# Altium PCB Audio_testboard.PcbDoc (part 3 of 6)
Units mm, origin at the board's own origin, x right, y up, seen from the top; angles counter-clockwise.
Board outline 220.73 x 144.32 mm, 4 copper layers (Top Layer, Mid-Layer 1, Mid-Layer 2, Bottom Layer), stack 1.894 mm thick; 462 components, 310 nets, 1757 pads, 740 vias.
Unrouted connection lines stored in the file: 5.
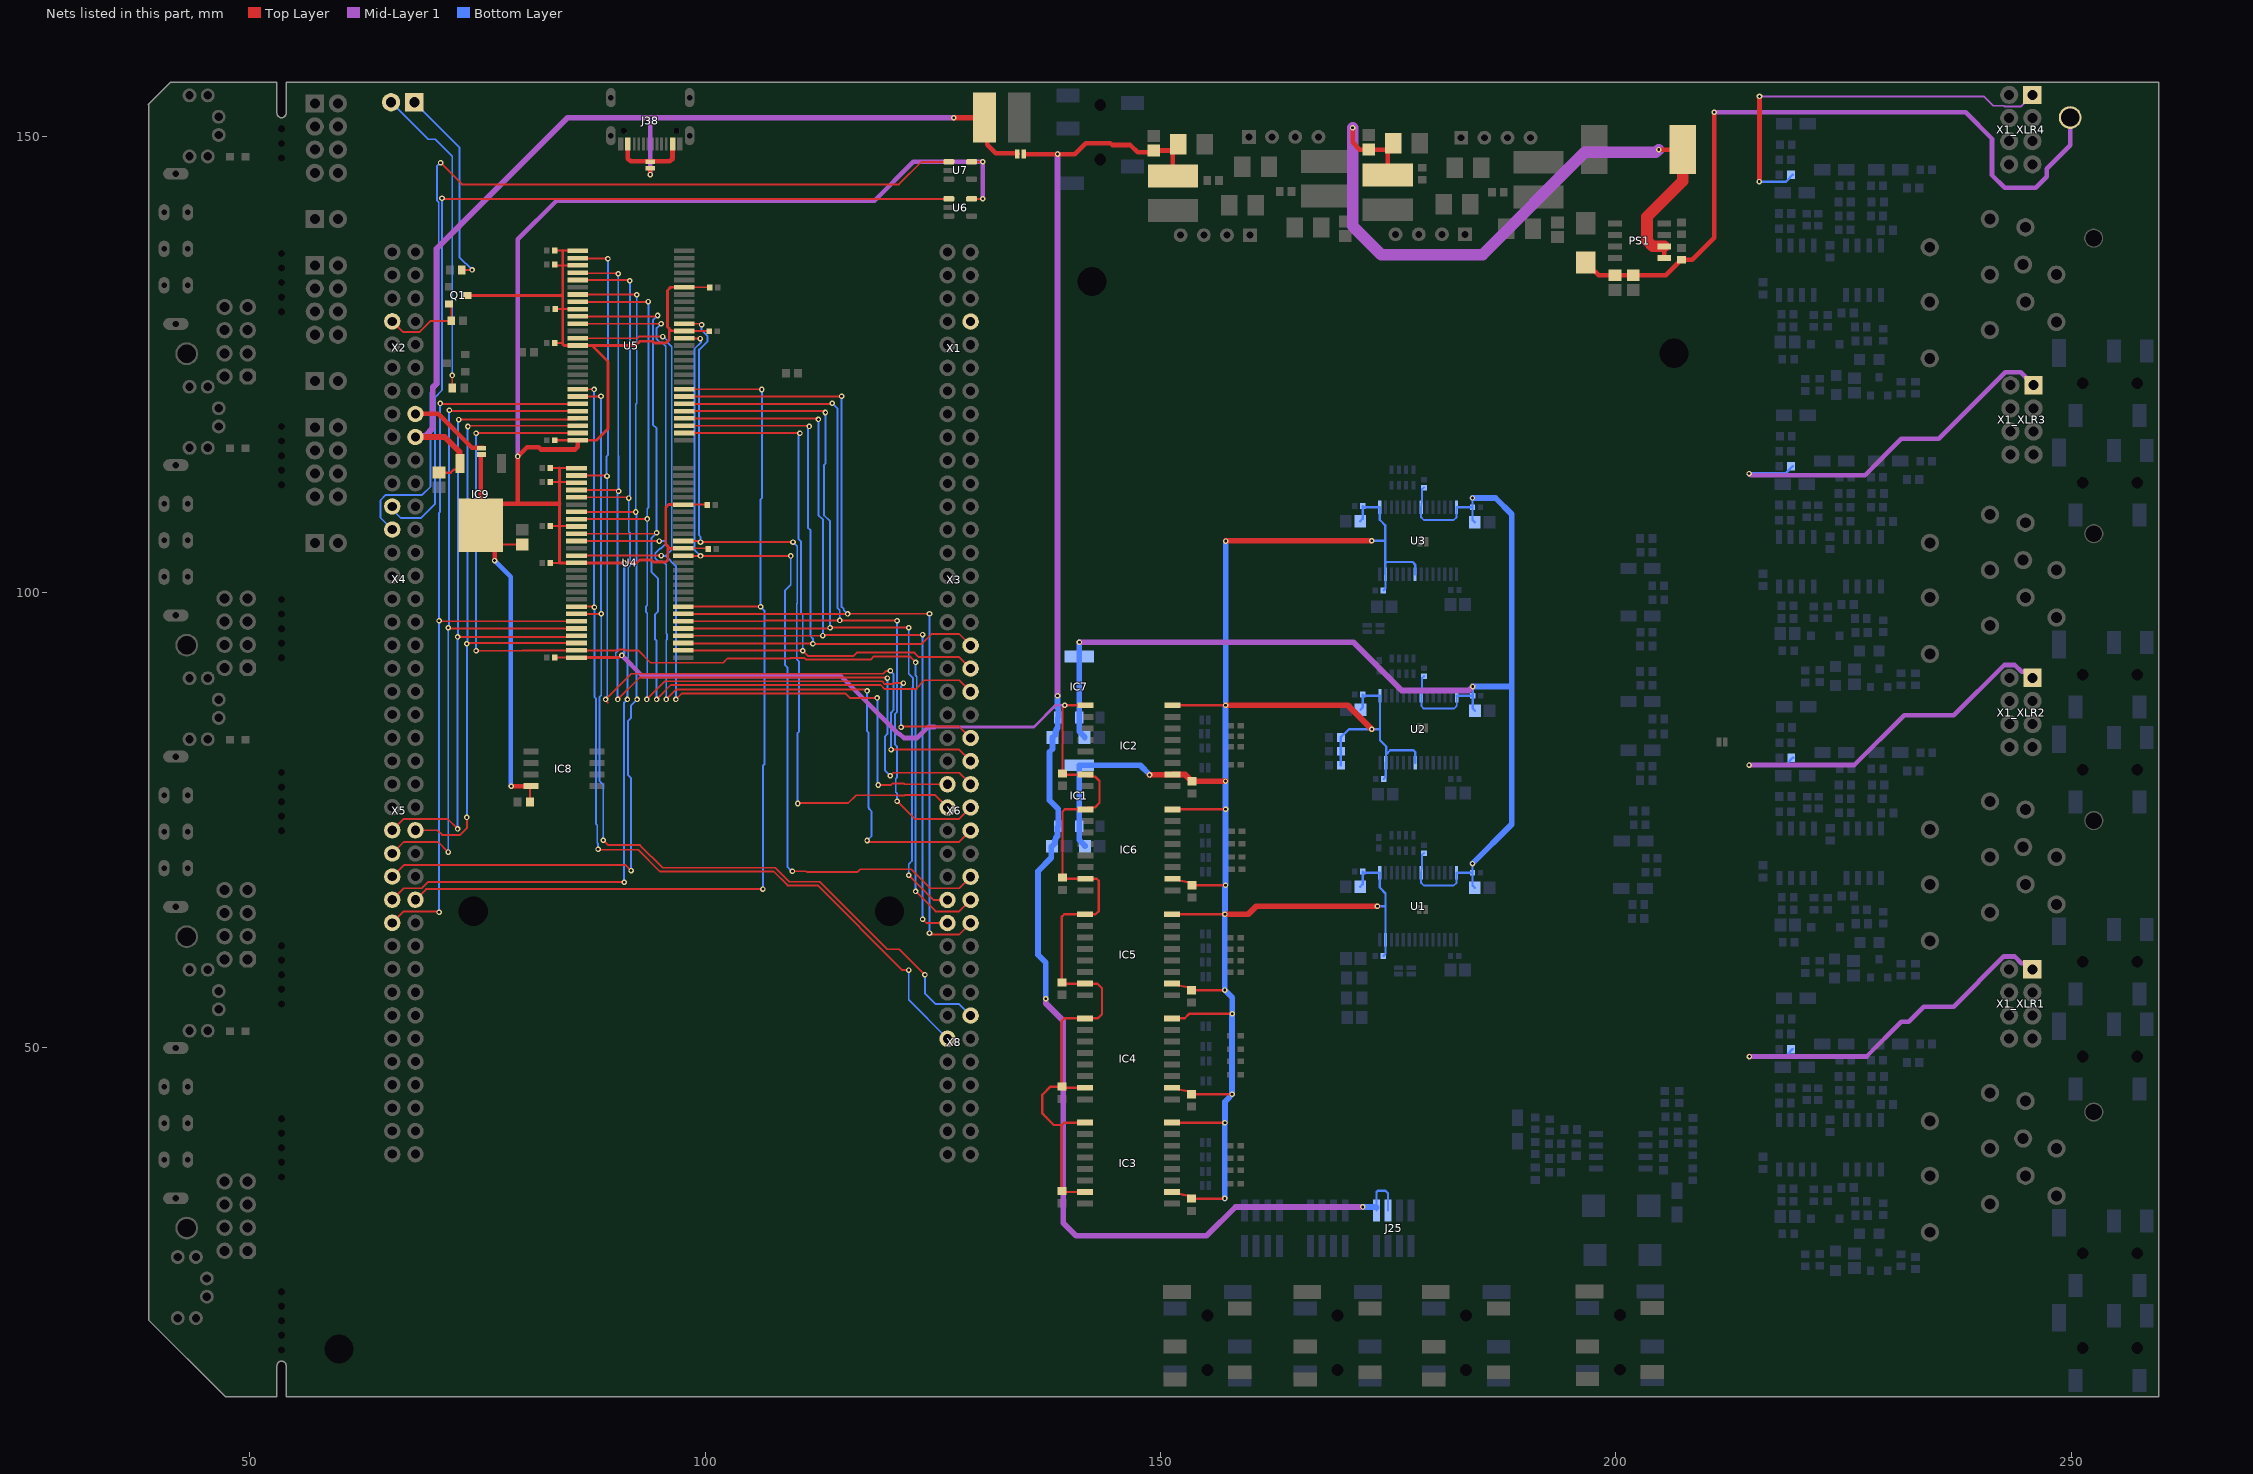
[diagram p4: the nets of this part, all layers, seen from the top]

## Part data (continued)
X1_1 X2_1 X3_1 X4_1: library part PBD-8, CurrentMax=3A, Manufacturer=Connfly, VoltageMax=500VAC, CommentText="\"Разъем\"", HelpURL=https://www.chipdip.ru/product/pbd-8, Multichannel=8pin, PartNumber=PBD-8, Pitch=2.54mm, TypeConnector=Connector, ValueManufacturerPartNumber="Connector, 8pin, 2.54mm, 500VAC, 3A"
X1_XLR1 X1_XLR2 X1_XLR3 X1_XLR4 X10 X13 X14: library part PLD-8, CurrentMax=3A, Manufacturer=Connfly, VoltageMax=500VAC, CommentText="\"Разъем\"", HelpURL=https://www.chipdip.ru/product/pld-8-ds1021-2x4, Multichannel=8pin, PartNumber=PLD-8, Pitch=2.54mm, TypeConnector=Connector, ValueManufacturerPartNumber="Connector, 8pin, 2.54mm, 500VAC, 3A"
X9 X11 X12 X15: library part PLS-2, CurrentMax=3A, Manufacturer=Connfly, VoltageMax=500VAC, CommentText="\"Разъем\"", HelpURL=https://www.chipdip.ru/product/pls-2, Multichannel=2pin, PartNumber=PLS-2, Pitch=2.54mm, TypeConnector=Connector, ValueManufacturerPartNumber="Connector, 2pin, 2.54mm, 500VAC, 3A"
Y1: library part ABM8G-24.576MHZ-4Y-T3, "CRYSTAL 24.5760MHZ 10PF SMD", Device Package="4-SMD, No Lead", ESR (Equivalent Series Resistance)="60 Ohms", Frequency Stability=±30ppm, Load Capacitance=10pF, Manufacturer="Abracon LLC", Operating Mode=Fundamental, Operating Temperature="-10°C ~ 60°C", Supplier Part Number 1=535-10914-1-ND, ComponentLink1Description=Datasheet, ComponentLink1URL=https://abracon.com/Resonators/ABM8G.pdf, ComponentLink2Description="DigiKey Link", ComponentLink2URL=http://digikey.com/product-detail/en/abracon-llc/ABM8G-24.576MHZ-4Y-T3/535-10914-1-ND/2624247, Frequency=24.576MHz, Frequency Tolerance=±30ppm, Height - Seated (Max)="0.039\" (1.00mm)", LastUpdated="3/19/2020 10:36:25 PM", Lifecycle Status=Active, Minimum Order=1, Mounting Type="Surface Mount", Package / Case="4-SMD, No Lead", Packaging=TapeAndReel, Part Number=ABM8G-24.576MHZ-4Y-T3, Part Status=Active, PartId=366, Price=0.39, Series=ABM8G, Size / Dimension="0.126\" L x 0.098\" W (3.20mm x 2.50mm)", Supplier 1=DigiKey, Type="MHz Crystal"

## Free pads (board coordinates)
  round 0 hole 3.2 unplated: 0(59.817,16.891) 0(74.55,64.971) 0(120.27,64.971) 0(142.494,134.112) 0(206.375,126.238)
  round 0 hole 0.8: 7(53.5,16.807) 7(53.5,18.407) 7(53.5,20.007) 7(53.5,21.607) 7(53.5,23.207) 7(53.5,35.8) 7(53.5,37.4) 7(53.5,39) 7(53.5,40.6) 7(53.5,42.2) 7(53.5,54.8) 7(53.5,56.4) 7(53.5,58) 7(53.5,59.6) 7(53.5,61.2) 7(53.5,73.8) 7(53.5,75.4) 7(53.5,77) 7(53.5,78.6) 7(53.5,80.2) 7(53.5,92.8) 7(53.5,94.4) 7(53.5,96) 7(53.5,97.6) 7(53.5,99.2) 7(53.5,111.8) 7(53.5,113.4) 7(53.5,115) 7(53.5,116.6) 7(53.5,118.2) 7(53.5,130.8) 7(53.5,132.4) 7(53.5,134) 7(53.5,135.6) 7(53.5,137.2) 7(53.5,147.677) 7(53.5,149.277) 7(53.5,150.877)

## Via types
v1: diameter 0.61, hole 0.305, Top Layer to Bottom Layer, 321 vias
v2: diameter 0.6, hole 0.3, Top Layer to Bottom Layer, tented both sides, 219 vias
v3: diameter 0.61, hole 0.305, Top Layer to Bottom Layer, tented both sides, 190 vias
v4: diameter 1.27, hole 0.711, Top Layer to Bottom Layer, 8 vias
v5: diameter 0.6, hole 0.3, Top Layer to Bottom Layer, 2 vias

## Nets (pads, with @x,y where several pads share a name; then routed paths per layer and width w, separated by ;. In a path a pad name is that pad's centre, name@x,y a point inside that pad or via, vN(x,y) a via of type N, cw(c..) or ccw(c..) an arc to the next point about the centre after c; other vN are vias at no path point)
5V_USB_STLK: X1.8
+3V3: J42.1 X2.16 | length 9
  Top Layer w0.508: X2.16@68.2,119.581 70.692,119.581 74.414,115.859 J42.1@75.622,115.859
+3V3_CODEC: C3.2 C4.2 C5.2 C6.2 C15.2 C16.2 C25.2 C40.2 C41.2 C46.2 IC7.2 IC7.4 U1.8 U1.14 U2.8 U2.14 U3.8 U3.14 | length 145.1
  Mid-Layer 1 w0.635: v1(141.1,94.5) 171.2,94.5 176.5,89.2 183.842,89.2 v2(184.285,89.643)
  Bottom Layer w0.203: C15.2@178.926,71.355 178.708,71.157 178.697,69.831 U1.8@178.621,69.196 178.621,68.078 178.901,67.799 182.203,67.799 182.507,68.104 U1.14@182.507,69.196 ; C46.2@178.926,111.487 178.708,111.289 178.697,109.963 U3.8@178.621,109.328 178.621,108.21 178.901,107.931 182.203,107.931 182.507,108.236 U3.14@182.507,109.328 ; C16.2@178.951,90.786 178.733,90.588 178.723,89.262 U2.8@178.647,88.627 178.647,87.509 178.926,87.23 182.228,87.23 182.533,87.535 U2.14@182.533,88.627
  Bottom Layer w0.254: U1.14@182.507,69.196 C3.2@184.26,69.196 ; U3.14@182.507,109.328 C40.2@184.26,109.328 ; U2.14@182.533,88.627 C5.2@184.285,88.627 ; v2(184.26,70.212) C3.2@184.26,69.196 ; v2(184.26,110.344) C40.2@184.26,109.328 ; v2(184.285,89.643) C5.2@184.285,88.627 ; C4.2@184.514,67.545 184.26,67.799 C3.2@184.26,69.196 ; C41.2@184.514,107.677 184.26,107.931 C40.2@184.26,109.328 ; C6.2@184.539,86.976 184.285,87.23 C5.2@184.285,88.627
  Bottom Layer w0.635: v1(141.1,94.5) 141.08,94.48 IC7.4@141.08,92.945 IC7.2@141.08,86.245 141.08,84.702 141.677,84.105 C25.2@141.677,84.055 ; v2(184.26,70.212) 188.578,74.53 188.578,89.643 ; v2(184.26,110.344) 186.8,110.344 188.578,108.566 188.578,89.643 ; v2(184.285,89.643) 188.578,89.643
+3V3_D: C1.2 C7.2 C8.2 C9.2 C10.2 C11.1 C12.1 C26.2 C35.2 C37.2 C39.2 C42.2 C43.2 C44.1 C54.2 IC1.2 IC1.4 IC2.10 IC2.16 IC3.10 IC3.16 IC4.10 IC4.16 IC5.10 IC5.16 IC6.10 IC6.16 R17.1 R18.1 R42.1 U1.1 U1.27 U2.1 U2.22 U2.27 U3.1 U3.22 U3.27 | length 262.8
  Top Layer w0.254: IC3.10@151.265,34.144 152.013,33.946 153.026,33.745 C39.2@153.399,33.422 157.05,33.422 v2(157.071,33.443) ; IC3.16@151.265,41.764 v2(157.082,41.764) ; IC4.10@151.265,45.594 152.013,45.396 153.026,45.195 C37.2@153.399,44.872 157.854,44.872 v2(157.865,44.883) ; IC4.16@151.265,53.214 152.657,53.214 153.148,53.705 v2(157.89,53.705) ; IC5.10@151.265,57.024 152.013,56.826 153.026,56.625 C35.2@153.399,56.302 v2@157.05,56.302 ; IC5.16@151.265,64.644 v2(157.082,64.644) ; IC6.10@151.336,68.542 152.084,68.344 153.097,68.143 C26.2@153.47,67.82 v2@157.121,67.82 ; IC6.16@151.336,76.162 v2(157.153,76.162) ; IC2.16@151.336,87.592 v2(157.153,87.592) ; C54.2@153.284,79.411 C54.2@153.47,79.25
  Top Layer w0.635: v2(148.8,79.943) 148.825,79.969 IC2.10@151.333,79.969 ; IC2.10@151.336,79.972 152.723,79.972 C54.2@153.284,79.411 ; C54.2@153.47,79.25 157.121,79.25 v2(157.142,79.271) ; v2(157.082,64.644) 159.642,64.644 160.511,65.513 v2(173.821,65.513) ; v2(157.153,87.592) 170.563,87.592 v2(173.211,84.944) ; v2(157.173,105.618) 157.2,105.645 v2(173.186,105.645)
  Bottom Layer w0.254: R18.1@169.812,81.007 R17.1@169.812,82.531 R42.1@169.812,84.055 169.812,84.105 170.11,84.403 170.16,84.403 170.701,84.944 v2(173.211,84.944) 174.1,84.944 ; C7.2@171.941,67.672 172.195,67.926 C8.2@172.195,69.323 172.322,69.196 U1.1@174.075,69.196 174.075,67.57 174.71,66.935 U1.27@174.71,61.83 174.71,60.301 174.481,60.072 C11.1@174.481,60.052 ; C42.2@171.941,107.804 172.195,108.058 C43.2@172.195,109.455 172.322,109.328 U3.1@174.075,109.328 174.075,107.956 174.693,107.338 174.693,105.645 ; C9.2@171.966,87.103 172.22,87.357 C10.2@172.22,88.754 172.347,88.627 U2.1@174.1,88.627 174.1,84.944 ; v2(173.186,105.645) 174.693,105.645 ; v2(173.821,65.513) 174.71,65.513 ; C44.1@174.481,100.184 174.481,100.204 174.71,100.433 U3.27@174.71,101.962 ; C12.1@174.506,79.503 174.679,79.676 174.679,79.789 174.735,79.845 U2.27@174.735,81.261 174.758,81.284 174.758,82.19 ; U3.27@174.693,101.979 174.693,103.164 ; U3.22@177.961,101.962 177.961,103.054 177.702,103.313 174.842,103.313 174.693,103.164 ; U2.22@177.986,81.261 177.986,82.455 177.783,82.658 175.226,82.658 174.758,82.19 ; 174.1,84.944 174.1,83.748 174.781,83.067 174.781,82.503 174.758,82.48 174.758,82.19 ; 174.693,103.164 174.693,105.645
  Bottom Layer w0.635: C1.2@141.715,72.117 141.715,72.167 141.08,72.802 IC1.2@141.08,74.307 IC1.4@141.08,81.007 147.789,81.007 148.8,79.996 v2(148.8,79.943) ; v2(157.071,33.443) 157.071,41.753 v2(157.082,41.764) 157.082,44.059 157.587,44.564 157.587,44.605 v2(157.865,44.883) 157.865,53.68 v2(157.89,53.705) 157.89,55.503 v2(157.071,56.323) 157.071,64.633 v2(157.082,64.644) 157.082,67.781 v2(157.142,67.841) 157.142,76.151 v2(157.153,76.162) 157.153,79.259 v2(157.142,79.271) 157.142,87.581 v2(157.153,87.592) ; v2@157.173,87.612 v2(157.173,105.618)
+5V: C71.2 IC9.3 J37.2 J44.1 L3.2 X2.18 | length 111.9
  Top Layer w0.254: C71.2@70.796,113.127 72.066,113.127 72.422,113.483 72.709,113.483 73.082,113.856 IC9.3@73.082,114.143
  Top Layer w0.508: v1(93.98,145.851) J37.2@93.98,146.558 ; L3.2@130.69,152.1 130.963,151.827 130.963,149.137 131.9,148.2 134.296,148.2 134.3,148.196 J44.1@134.3,148.1
  Top Layer w0.635: X2.18@68.2,117.041 71.427,117.041 73.036,115.432 73.036,114.189 IC9.3@73.082,114.143 ; v1(127.3,152.1) L3.2@130.69,152.1
  Mid-Layer 1 w0.508: v1(93.98,145.851) 93.98,152.1
  Mid-Layer 1 w0.635: X2.18@68.2,117.041 68.305,117.145 69.245,117.145 70.1,118 70.1,122.5 70.5,122.9 70.5,137.7 84.9,152.1 93.98,152.1 v1(127.3,152.1)
+5V_Out: C2.2 C23.2 C72.1 C73.2 IC1.3 IC7.3 J25.6 J25.8 J44.2 L2.1 | length 183.1
  Top Layer w0.508: J44.2@135,148.1 v1(138.7,148.1) 140.6,148.1 141.8,149.3 144.5,149.3 144.7,149.1 146.7,149.1 147.5,148.3 149.06,148.3 C73.2@149.26,148.5 151.314,148.5 C72.1@151.36,148.546 ; L2.1@151.36,145.71 C72.1@151.36,148.546 ; C72.1@151.96,149.2 151.96,149.146 C72.1@151.36,148.546
  Mid-Layer 1 w0.635: v2(137.397,55.353) 137.397,54.881 139.319,52.959 139.319,30.734 140.716,29.337 155.067,29.337 158.242,32.512 v1(172.212,32.512) ; v1(138.7,88.629) v1(138.7,148.1)
  Bottom Layer w0.254: J25.8@173.719,32.112 173.719,32.449 173.719,34.141 173.868,34.29 174.718,34.29 174.989,34.019 J25.6@174.989,32.112
  Bottom Layer w0.635: v2(137.397,55.353) 137.397,59.353 136.555,60.195 136.555,69.37 138.021,70.836 138.021,72.055 C2.2@138.083,72.117 138.416,72.45 138.416,72.775 138.512,72.871 138.512,73.033 138.687,73.208 138.687,74.204 IC1.3@138.79,74.307 138.79,76.185 137.824,77.151 137.824,82.446 138.159,82.781 C23.2@138.159,84.055 138.492,84.387 138.492,84.713 138.588,84.809 138.588,84.971 138.725,85.108 138.725,86.18 IC7.3@138.79,86.245 138.79,87.214 138.7,87.304 v1(138.7,88.629) ; v1(172.212,32.512) 173.657,32.512 J25.8@173.719,32.449
+5V_Out_48V: C91.1 C92.2 L1.1 L5.1 PS1.1 PS1.2 | length 77.7
  Top Layer w0.508: v1(171.1,151.008) 171.1,149.4 171.9,148.6 C92.2@172.86,148.6 174.914,148.6 C91.1@174.96,148.646 ; L5.1@174.96,145.81 C91.1@174.96,148.646 ; C91.1@175.56,149.3 175.56,149.246 C91.1@174.96,148.646 ; v1(204.7,148.6) L1.1@207.35,148.6 ; PS1.1@205.312,136.695 PS1.2@205.312,137.965
  Top Layer w1.27: PS1.2@205.312,137.965 204.068,137.965 203.417,138.617 203.417,141.213 207.35,145.146 L1.1@207.35,148.6
  Mid-Layer 1 w1.27: v1(171.1,151.008) 171.1,140.2 174.233,137.067 185.367,137.067 196.6,148.3 204.4,148.3 v1(204.7,148.6)
+5V_USB: J37.1 J38.A4B9 J38.B4A9 | length 8.3
  Top Layer w0.508: J38.B4A9@91.53,149.21 91.53,147.611 91.821,147.32 93.98,147.32 96.139,147.32 96.43,147.611 J38.A4B9@96.43,149.21
+48V: C93.2 C94.2 D3.2 MH5_XLR4.0 R45.2 | length 80.3
  Top Layer w0.203: C93.2@199.347,134.8 C93.2@199.9,134.8
  Top Layer w0.508: D3.2@196.7,136.2 196.7,136.05 197.521,135.229 197.671,135.229 198.1,134.8 C93.2@199.347,134.8 ; C93.2@199.9,134.8 C94.2@201.9,134.8 205.5,134.8 R45.2@206.979,136.279 ; R45.2@207.2,136.5 208.4,136.5 210.8,138.9 v1(210.8,152.7)
  Mid-Layer 1 w0.508: v1(210.8,152.7) 238.4,152.7 241.3,149.8 241.3,145.8 242.7,144.4 246.1,144.4 247.3,145.6 247.3,146.5 249.886,149.086 MH5_XLR4.0@249.886,152.11
+48V_Enabled: R16_XLR1.2 R16_XLR2.2 R16_XLR3.2 R16_XLR4.2 X1_XLR1.1 X1_XLR2.1 X1_XLR3.1 X1_XLR4.1 | length 169
  Top Layer w0.508: v1@214.63,49.128 214.644,49.113 214.644,49.041 v1(214.664,49.022) ; v1(215.75,145.085) 215.75,145.112 215.773,145.135 v1(215.773,154.432)
  Mid-Layer 1 w0.203: v1(215.773,154.432) 240.411,154.432 241.427,153.416 242.603,153.416 242.702,153.317 244.443,153.317 X1_XLR4.1@245.729,154.603
  Mid-Layer 1 w0.508: v1(214.63,81.026) 226.187,81.026 231.648,86.487 237.116,86.487 242.638,92.009 243.804,92.009 244.548,91.265 245.099,91.265 X1_XLR2.1@245.761,90.603 ; v1(214.63,113.03) 214.657,113.03 214.83,112.858 227.358,112.858 231.337,116.837 235.438,116.837 242.733,124.132 244.45,124.132 X1_XLR3.1@245.856,122.726 ; v1(214.664,49.022) 227.522,49.022 231.337,52.837 232.161,52.837 233.807,54.483 237.08,54.483 242.606,60.009 243.772,60.009 244.516,59.265 245.067,59.265 X1_XLR1.1@245.729,58.603
  Bottom Layer w0.254: v1(214.63,81.026) 214.682,81.078 218.71,81.078 219.149,81.517 219.149,81.567 219.422,81.84 R16_XLR2.2@219.472,81.84 ; v1(214.63,113.03) 214.678,113.078 218.678,113.078 219.117,113.517 219.117,113.567 219.39,113.84 R16_XLR3.2@219.44,113.84 ; v1(214.664,49.022) 214.72,49.078 218.678,49.078 219.117,49.517 219.117,49.567 219.39,49.84 R16_XLR1.2@219.44,49.84 ; v1(215.75,145.085) 215.757,145.078 218.678,145.078 219.117,145.517 219.117,145.567 219.39,145.84 R16_XLR4.2@219.44,145.84
+MCU: C24.2 C34.2 C36.2 C38.2 C53.2 C55.1 C56.1 C57.1 C58.1 C59.1 C60.1 C61.1 C62.1 C63.1 C64.1 C65.1 C66.1 C67.1 C68.1 C69.2 C70.2 IC2.1 IC2.7 IC3.1 IC3.7 IC4.1 IC4.7 IC5.1 IC5.7 IC6.1 IC6.7 IC8.8 IC9.4 J42.2 Q1.3 U4.1 U4.3 U4.9 U4.14 U4.27 U4.43 U4.49 U5.1 U5.3 U5.9 U5.14 U5.27 U5.43 U5.49 U6.5 U7.5 | length 432.1
  Top Layer w0.203: IC9.4@77.452,105.253 C70.2@79.94,105.253 ; C69.2@80.772,76.962 80.772,78.57 IC8.8@80.912,78.71 ; C60.1@82.988,103.221 84.004,103.221 ; C59.1@82.988,107.285 84.004,107.285 85.837,107.285 U4.9@85.901,107.221 ; C58.1@82.988,112.111 84.004,112.111 85.811,112.111 U4.3@85.901,112.021 ; C57.1@82.988,113.635 84.004,113.635 85.887,113.635 U4.1@85.901,113.621 ; C65.1@83.496,127.351 84.258,127.351 ; C63.1@83.496,135.987 83.6,135.883 84.377,135.883 U5.3@86.02,135.883 ; C62.1@83.496,137.511 84.377,137.511 85.992,137.511 U5.1@86.02,137.483 ; C61.1@83.51,92.821 U4.27@85.901,92.821 ; C64.1@83.574,131.083 84.377,131.083 U5.9@86.02,131.083 ; U4.43@97.601,104.821 100.252,104.821 C55.1@100.328,104.745 ; U4.49@97.601,109.621 100.21,109.621 C68.1@100.26,109.571 ; U5.43@97.72,128.683 100.452,128.683 C67.1@100.514,128.621 ; U5.49@97.72,133.483 100.478,133.483 C66.1@100.514,133.447 ; U6.5@129.271,143.19 v1(130.49,143.19) ; U7.5@129.271,147.254 v1(130.49,147.254)
  Top Layer w0.254: 139.246,87.338 C53.2@139.246,80.099 139.373,79.972 IC2.7@141.786,79.972 141.984,79.774 142.804,79.774 143.316,79.262 143.316,76.875 142.801,76.36 141.984,76.36 IC6.1@141.786,76.162 139.5,76.162 139.246,75.908 C24.2@139.246,68.669 139.373,68.542 IC6.7@141.786,68.542 143.004,68.542 143.239,68.307 143.239,65.005 142.878,64.644 IC5.1@141.715,64.644 139.429,64.644 139.175,64.39 C34.2@139.175,57.151 139.302,57.024 IC5.7@141.715,57.024 143.092,57.024 143.589,56.527 143.589,53.671 143.132,53.214 IC4.1@141.715,53.214 139.429,53.214 139.175,52.96 C36.2@139.175,45.721 ; v1@139.5,87.592 IC2.1@141.786,87.592 ; IC3.7@141.715,34.144 139.302,34.144 C38.2@139.175,34.271 139.175,41.51 ; IC3.1@141.715,41.764 139.429,41.764 139.175,41.51 ; IC4.7@141.715,45.594 139.302,45.594 C36.2@139.175,45.721 ; 139.175,41.51 138.286,41.51 137.448,42.348 137.447,42.348 137.034,42.761 137.034,44.83 137.925,45.721 C36.2@139.175,45.721
  Top Layer w0.305: Q1.3@73.898,132.588 84.25,132.588 84.377,132.715 ; C56.1@83.496,116.683 U5.27@86.02,116.683 88.068,116.683 89.338,117.953 89.338,125.319 87.574,127.083 ; 84.004,113.635 84.004,112.111 84.004,109.698 84.004,107.285 84.004,103.221 U4.14@85.901,103.221 v3(91.116,103.221) 92.469,103.221 92.789,103.542 94.122,103.542 94.354,103.31 95.686,103.31 95.908,103.532 95.908,105.004 ; 84.377,137.511 84.377,135.883 84.377,132.715 ; U4.27@85.901,92.821 90.54,92.821 90.78,93.061 v3(90.862,93.061) ; 96.144,104.811 95.684,105.271 95.684,109.313 95.992,109.621 U4.49@97.601,109.621 ; 96.175,104.811 U4.43@97.591,104.811 ; U5.43@97.72,128.683 97.696,128.707 96.31,128.707 96.057,128.961 ; U5.49@97.72,133.483 96.232,133.483 95.884,133.135 95.884,129.133 96.057,128.961 ; 84.377,132.715 84.377,131.083 84.377,127.232 84.526,127.083 U5.14@86.02,127.083 87.574,127.083 ; 87.574,127.083 92.382,127.083 92.853,127.554 94.228,127.554 94.431,127.351 95.705,127.351 96.057,127.702 96.057,128.961
  Top Layer w0.508: J42.2@75.368,114.905 75.362,114.899 IC9.4@75.362,107.502 ; v3@76.897,103.48 76.897,105.808 IC9.4@75.362,107.343 IC9.4@75.362,107.502 ; v3(78.713,78.691) 78.731,78.71 IC8.8@80.912,78.71 ; 84.004,109.698 79.432,109.698 ; U5.27@86.02,116.683 86.02,115.965 85.722,115.667 81.972,115.667 81.718,115.921 80.448,115.921 v1(79.432,114.905) 79.432,109.698 ; IC9.4@75.362,107.502 77.558,109.698 79.432,109.698
  Mid-Layer 1 w0.305: 125.2,85.2 126.12,85.2 ; 126.121,85.201 135.699,85.201 136.101,85.201 138.5,87.6 v1(139.5,87.6)
  Mid-Layer 1 w0.508: v1(79.432,114.905) 79.432,138.741 83.693,143.002 118.602,143.002 122.854,147.254 v1(130.49,147.254) v1(130.49,143.19) ; v3(90.862,93.061) 93.118,90.805 114.896,90.805 121.225,84.476 121.324,84.476 121.8,84 123.3,84 124.5,85.2 125.2,85.2
  Bottom Layer w0.305: v3(90.862,93.061) 91.116,93.315 v3(91.116,103.221)
  Bottom Layer w0.508: v3(76.892,103.475) 78.67,101.697 v3@78.67,78.691
A0: U4.23 U5.23 X5.13 | length 83.7
  Top Layer w0.203: X5.13@65.66,71.321 66.916,72.576 70.707,72.576 v3(71.812,71.471) ; v3(71.931,119.971) 72.041,119.971 72.129,119.883 U5.23@86.02,119.883 ; v3@72.01,96.021 U4.23@85.901,96.021
  Bottom Layer w0.203: v3(71.812,71.471) v3(71.812,96.109) 71.871,96.168 71.871,119.911 v3(71.931,119.971)
A1: U4.24 U5.24 X5.11 | length 79.2
  Top Layer w0.203: X5.11@65.66,73.861 66.916,75.116 71.723,75.116 v3(72.828,74.011) ; v3(72.828,95.093) 85.773,95.093 U4.24@85.901,95.221 ; v3(72.947,118.955) U5.24@85.892,118.955
  Bottom Layer w0.203: v3(72.828,74.011) v3(72.828,95.093) 72.887,95.152 72.887,118.895 v3(72.947,118.955)
A2: U4.25 U5.25 X5.12 | length 74.3
  Top Layer w0.203: X5.12@68.2,73.861 70.612,73.861 71.122,73.351 73.102,73.351 73.844,74.093 v3(73.844,75.281) ; v3(73.963,118.193) 74.073,118.193 74.163,118.283 U5.25@86.02,118.283 ; v3@74.044,94.421 U4.25@85.901,94.421
  Bottom Layer w0.203: v3(73.844,75.281) v3(73.844,94.331) 73.903,94.39 73.903,118.133 v3(73.963,118.193)
A3: U4.26 U5.26 X6.18 | length 117.4
  Top Layer w0.203: v3(74.86,93.569) 79.928,93.569 79.98,93.621 U4.26@85.901,93.621 90.488,93.621 90.588,93.721 91.136,93.721 91.236,93.621 92.649,93.621 94.008,92.262 101.996,92.262 102.463,92.729 109.343,92.729 109.384,92.77 110.949,92.77 111.115,92.604 118.173,92.604 118.528,92.959 122.46,92.959 v3(123.12,92.299) ; v3(74.86,117.445) 74.898,117.483 U5.26@86.02,117.483 ; v3(123.12,67.153) 125.313,64.96 127.904,64.96 X6.18@129.16,66.216
  Bottom Layer w0.203: v3(74.86,93.569) v3(74.86,117.445) ; v3(123.12,67.153) 123.12,89.283 123.247,89.409 123.247,90.736 123.12,90.862 v3(123.12,92.299)
A4: U4.29 U5.29 X3.18 | length 69.5
  Top Layer w0.203: U4.29@97.601,93.621 97.627,93.595 110.699,93.595 v3(110.725,93.569) ; U5.29@97.72,117.483 110.382,117.483 v3(110.42,117.445) ; v3@110.777,93.569 110.777,93.517 111.284,93.01 116.318,93.01 116.674,93.366 122.987,93.366 123.481,92.871 127.904,92.871 X3.18@129.16,91.616
  Bottom Layer w0.203: v3(110.42,117.445) 110.42,117.335 110.268,117.183 110.268,105.831 110.522,105.577 110.522,97.719 110.725,97.515 v3(110.725,93.569)
A5: U4.30 U5.30 X3.16 | length 70.4
  Top Layer w0.203: U4.30@97.601,94.421 97.646,94.376 111.797,94.376 v3(111.842,94.331) ; U5.30@97.72,118.283 111.36,118.283 v3(111.436,118.207) ; v3@111.932,94.331 123.8,94.331 124.88,95.411 127.904,95.411 X3.16@129.16,94.156
  Bottom Layer w0.203: v3(111.436,118.207) 111.436,118.097 111.284,117.945 111.284,107.101 111.588,106.797 111.588,95.164 111.842,94.91 v3(111.842,94.331)
A6: U4.31 U5.31 X6.19 | length 99.2
  Top Layer w0.203: U4.31@97.601,95.221 97.609,95.229 112.909,95.229 112.972,95.292 123.827,95.292 v3(123.882,95.347) ; U5.31@97.72,119.083 112.228,119.083 112.342,118.969 v3(112.452,118.969) ; v3(123.882,64.105) 124.311,63.676 X6.19@126.62,63.676
  Bottom Layer w0.203: v3(112.452,118.969) 112.452,108.473 112.933,107.992 v3(112.933,95.237) ; v3(123.882,64.105) v3(123.882,95.347)
A7: U4.32 U5.32 X6.17 | length 97.3
  Top Layer w0.203: U4.32@97.601,96.021 113.524,96.021 113.612,96.109 v3(122.358,96.109) ; U5.32@97.72,119.883 112.952,119.883 113.104,119.731 v3(113.214,119.731) ; v3(122.358,68.931) 125.073,66.216 X6.17@126.62,66.216
  Bottom Layer w0.203: v3(113.214,119.731) 113.214,114.106 113.062,113.953 113.062,108.438 113.722,107.778 v3(113.722,96.109) ; v3(122.358,68.931) 122.358,70.134 122.714,70.49 122.714,89.451 122.84,89.578 122.84,90.568 122.358,91.05 v3(122.358,96.109)
A8: U4.33 U5.33 X6.10 | length 93.5
  Top Layer w0.203: U4.33@97.601,96.821 106.577,96.821 106.666,96.91 v3(114.789,96.91) ; U5.33@97.72,120.683 113.912,120.683 v3(113.976,120.747) ; v3@114.758,96.891 121.068,96.891 v3(121.088,96.871) ; v3(121.085,77.052) 121.095,77.052 123.027,75.12 127.904,75.12 X6.10@129.16,76.376
  Bottom Layer w0.203: v3(113.976,120.747) 114.535,120.188 114.535,98.277 114.789,98.023 v3(114.789,96.91) ; v3(121.085,77.052) 121.085,77.906 120.936,78.055 120.936,79.529 121.088,79.681 121.088,83.046 120.859,83.275 120.859,86.64 121.089,86.87 121.089,96.87 v3(121.088,96.871)
A9: U4.34 U5.34 X6.20 | length 108.6
  Top Layer w0.203: U4.34@97.601,97.621 97.602,97.622 v3(115.642,97.623) v3(115.642,97.623) ; U5.34@97.72,121.483 114.966,121.483 v3(114.992,121.509) ; v3@115.642,97.627 115.648,97.633 v3(124.644,97.633) ; v3(124.644,62.581) 124.754,62.581 124.915,62.42 127.904,62.42 X6.20@129.16,63.676
  Bottom Layer w0.203: v3(114.992,121.509) 114.992,98.395 115.222,98.165 115.222,98.044 v3(115.642,97.623) ; v3(124.644,62.581) v3(124.644,97.633)
A10: U4.22 U5.22 X5.19 | length 91.9
  Top Layer w0.203: X5.19@65.66,63.701 66.916,64.956 70.597,64.956 70.686,64.867 v3(70.796,64.867) ; v3(70.796,96.871) 70.846,96.821 U4.22@85.901,96.821 ; v3(70.915,120.733) 70.965,120.683 U5.22@86.02,120.683
  Bottom Layer w0.203: v3(70.796,64.867) v3(70.796,96.871) 70.796,108.704 70.894,108.802 70.894,120.712 v3(70.915,120.733)
A11: U4.35 U5.35 X5.18 | length 110.8
  Top Layer w0.203: X5.18@68.2,66.241 69.366,67.407 v3(106.356,67.407) ; U4.35@97.601,98.421 106.076,98.421 v3(106.102,98.395) ; U5.35@97.72,122.283 v3@106.195,122.283
  Bottom Layer w0.203: v3(106.221,122.257) 106.254,122.224 106.254,110.363 106.102,110.211 106.102,98.285 106.212,98.285 106.508,97.989 106.508,81.103 106.356,80.951 106.356,67.526 v3@106.278,67.448
AAUDIO_NRST: R107.1 X15.2 | length 34.6
  Top Layer w0.203: R107.1@72.248,122.428 v1(72.248,123.81)
  Bottom Layer w0.203: X15.2@65.532,153.797 69.596,149.733 70.358,149.733 72.248,147.843 v1(72.248,123.81)
AUDIO_BOOT: R106.1 X15.1 | length 22.2
  Top Layer w0.203: R106.1@73.294,135.382 v1(74.422,135.382)
  Bottom Layer w0.203: X15.1@68.072,153.797 73.025,148.844 73.025,136.779 v1(74.422,135.382)
BA0: U4.20 U5.20 X8.9 | length 103.4
  Top Layer w0.203: U4.20@85.901,98.421 87.659,98.421 87.739,98.341 v3(87.849,98.341) ; U5.20@86.02,122.283 87.802,122.283 v3(87.814,122.271) ; v3(88.25,71.782) 88.306,71.725 92.64,71.725 95.028,69.337 107.54,69.337 109.064,67.813 112.366,67.813 121.663,58.517 v3(122.358,58.517)
  Bottom Layer w0.203: v3(87.814,122.271) 87.814,98.376 v3(87.849,98.341) 87.849,88.521 88.017,88.353 88.017,74.57 88.165,74.422 88.165,72.489 88.25,72.404 v3(88.25,71.782) ; v3(122.358,58.517) 122.358,55.238 X8.9@126.62,50.976
BA1: U4.21 U5.21 X8.8 | length 103.8
  Top Layer w0.203: U4.21@85.901,97.621 88.59,97.621 v3(88.6,97.631) ; U5.21@86.02,121.483 88.55,121.483 v3(88.576,121.509) ; v3(88.825,72.768) 88.825,72.762 89.355,72.233 92.85,72.233 95.34,69.744 107.709,69.744 109.233,68.22 112.612,68.22 120.028,60.803 121.342,60.803 v3(124.136,58.009)
  Bottom Layer w0.203: v3(88.576,121.509) 88.576,97.656 v3(88.6,97.631) 88.6,88.685 88.424,88.509 88.424,79.243 88.83,78.837 88.83,72.772 v3(88.825,72.768) ; v3(124.136,58.009) 124.136,55.977 125.342,54.771 127.904,54.771 X8.8@129.16,53.516
BOOT0: Q1.2 R109.1 X2.7 | length 9.4
  Top Layer w0.203: X2.7@65.66,129.741 66.814,128.587 68.678,128.587 69.885,129.794 R109.1@72.136,129.794 72.136,131.4 Q1.2@71.898,131.638
CODEC_GPIO1: U6.1 X4.3 | length 95.6
  Top Layer w0.203: v1(71.12,143.256) 71.186,143.19 U6.1@126.761,143.19
  Bottom Layer w0.203: X4.3@65.66,109.421 65.66,109.092 66.618,108.133 68.763,108.133 70.355,109.725 70.355,121.409 71.12,122.174 v1(71.12,143.256)
CODEC_GPIO2: U7.1 X4.5 | length 103.9
  Top Layer w0.203: v1(70.956,147.156) 73.333,144.78 121.29,144.78 123.764,147.254 U7.1@126.761,147.254
  Bottom Layer w0.203: X4.5@65.66,106.881 65.66,106.905 64.366,108.199 64.366,110.102 64.947,110.683 68.944,110.683 69.855,111.594 69.855,121.925 70.764,122.834 70.764,142.821 70.561,143.025 70.561,146.761 v1(70.956,147.156)
D0: U4.2 U5.2 X6.6 | length 106.4
  Top Layer w0.203: U4.2@85.901,112.821 89.161,112.821 v3(89.236,112.746) ; U5.2@86.02,136.683 86.057,136.645 89.292,136.645 v3(89.33,136.608) ; 89.338,87.871 89.084,88.125 v3(89.084,88.235) 91.891,91.042 119.56,91.042 119.885,91.367 v3(120.356,91.367) ; v3(120.428,82.729) 127.887,82.729 X6.6@129.16,81.456
  Bottom Layer w0.203: v3(89.084,88.235) 89.084,88.345 89.261,88.522 89.261,112.696 v3@89.224,112.733 ; v3(89.236,112.746) 89.186,112.797 89.186,114.925 89.33,115.069 v3(89.33,136.608) ; v3(120.356,91.367) 120.683,91.04 120.683,87.039 120.429,86.785 120.429,82.73 v3(120.428,82.729)
D1: U4.4 U5.4 X6.8 | length 107.3
  Top Layer w0.203: U4.4@85.901,111.221 90.27,111.221 90.396,111.095 v3(90.506,111.095) ; U5.4@86.02,135.083 86.083,135.02 90.41,135.02 v3(90.473,134.957) ; v3(90.405,88.235) 92.805,90.635 119.958,90.635 v3(120.023,90.57) ; v3(120.326,79.853) 120.644,80.171 127.904,80.171 X6.8@129.16,78.916
  Bottom Layer w0.203: v3(90.405,88.235) 90.405,92.584 90.202,92.787 90.202,93.335 90.405,93.538 90.405,111.044 90.456,111.095 v3(90.506,111.095) ; v3(90.473,134.957) 90.473,114.958 90.506,114.925 v3@90.506,111.146 ; v3(120.023,90.57) 120.023,84.45 119.767,84.194 119.767,80.412 v3(120.326,79.853)
D2: U4.5 U5.5 X5.17 | length 104.2
  Top Layer w0.203: X5.17@65.66,66.241 66.916,67.496 68.881,67.496 69.553,68.169 v3(91.116,68.169) ; U4.5@85.901,110.421 91.536,110.421 v3(91.624,110.333) ; U5.5@86.02,134.283 91.655,134.283 v3(91.743,134.195)
  Bottom Layer w0.203: v3(91.116,68.169) 91.116,87.879 v3(91.472,88.235) 91.472,92.737 91.573,92.838 91.573,102.744 91.776,102.947 91.776,106.509 91.624,106.661 91.624,110.443 91.743,110.562 v3(91.743,134.195)
D3: U4.7 U5.7 X5.15 | length 103.9
  Top Layer w0.203: X5.15@65.66,68.781 66.916,70.036 91.281,70.036 v3(91.878,69.439) ; U4.7@85.901,108.821 92.374,108.821 v3(92.386,108.809) ; U5.7@86.02,132.683 92.493,132.683 v3(92.505,132.671)
  Bottom Layer w0.203: v3(91.878,69.439) 91.878,79.599 91.522,79.955 91.522,85.847 91.878,86.203 91.878,87.575 v3(92.538,88.235) 92.462,88.311 92.462,108.733 v3(92.386,108.809) 92.386,120.642 92.505,120.761 v3(92.505,132.671)
D4: U4.8 U5.8 X6.4 | length 101.7
  Top Layer w0.203: U4.8@85.901,108.021 93.63,108.021 v3(93.656,108.047) ; U5.8@86.02,131.883 93.749,131.883 v3(93.775,131.909) ; v3(93.605,88.235) 95.599,90.229 119.43,90.229 119.749,89.91 120.651,89.91 120.761,90.02 v3(121.773,90.02) ; v3(121.519,85.187) 121.584,85.251 127.904,85.251 X6.4@129.16,83.996
  Bottom Layer w0.203: v3(93.605,88.235) 93.656,88.286 93.656,97.715 93.504,97.867 93.504,98.415 93.656,98.567 v3(93.656,108.047) 93.656,109.179 93.808,109.331 93.808,110.353 93.775,110.386 v3(93.775,131.909) ; v3(121.519,85.187) 121.519,89.656 121.773,89.91 v3(121.773,90.02)
D5: U4.10 U5.10 X3.20 | length 96.9
  Top Layer w0.203: U4.10@85.901,106.421 v3@94.46,106.421 ; U5.10@86.02,130.283 94.579,130.283 94.681,130.385 v3(94.791,130.385) ; v3(94.672,88.235) 96.259,89.822 119.262,89.822 119.725,89.359 123.113,89.359 124.085,90.331 127.904,90.331 X3.20@129.16,89.076
  Bottom Layer w0.203: v3(94.672,88.235) 94.672,94.667 94.52,94.819 94.52,97.563 94.824,97.867 94.824,101.522 94.13,102.216 94.13,105.981 v3(94.672,106.523) 94.672,118.001 94.279,118.394 94.279,129.873 v3(94.791,130.385)
D6: U4.11 U5.11 X6.12 | length 113.7
  Top Layer w0.203: U4.11@85.901,105.621 v3(94.973,105.621) ; U5.11@86.02,129.483 v3(95.173,129.483) ; v3(95.739,88.235) 96.806,89.302 117.536,89.302 117.676,89.162 v3(117.786,89.162) ; v3(117.786,72.741) 117.896,72.741 118.057,72.58 127.904,72.58 X6.12@129.16,73.836
  Bottom Layer w0.203: v3(94.973,105.621) 95.688,105.621 ; v3(95.173,129.483) 94.685,128.995 94.685,127.789 95.072,127.402 95.316,127.402 95.688,127.03 95.688,105.621 ; v3(95.739,88.235) 95.739,94.718 95.84,94.819 95.84,95.367 95.739,95.468 95.739,102.998 95.376,103.361 94.924,103.361 94.537,103.747 94.537,104.295 95.056,104.814 95.168,104.814 95.688,105.334 95.688,105.621 ; v3(117.786,72.741) 118.272,73.227 118.272,75.949 118.018,76.203 118.018,76.284 117.938,76.364 117.938,84.613 117.786,84.765 v3(117.786,89.162)
D7: U4.13 U5.13 X6.7 | length 100.1
  Top Layer w0.203: U4.13@85.901,104.021 v3(95.197,104.021) ; U5.13@86.02,127.883 92.536,127.883 92.715,128.062 v3(95.345,128.062) ; v3(96.806,88.235) 97.466,88.895 115.395,88.895 115.891,88.4 v3(118.891,88.4) ; v3(119.005,78.837) 120.416,78.837 120.569,78.989 121.87,78.989 121.943,78.916 X6.7@126.62,78.916
  Bottom Layer w0.203: v3(95.197,104.021) 95.235,103.983 95.688,103.983 ; v3(95.345,128.062) 95.4,128.062 95.881,127.582 95.881,127.412 96.348,126.944 96.348,104.643 95.688,103.983 ; v3(96.806,88.235) 96.806,102.865 95.688,103.983 ; v3(118.891,88.4) 118.948,88.343 118.948,78.894 v3(119.005,78.837)
D8: U4.42 U5.42 X6.16 | length 94.4
  Top Layer w0.203: U4.42@97.601,104.021 97.639,103.983 v3(99.498,103.983) v3(109.404,103.983) ; U5.42@97.758,127.845 v3(99.465,127.845) ; v3(109.59,69.371) 111.078,69.371 111.162,69.287 116.745,69.287 117.049,69.591 122.632,69.591 124.723,67.5 127.904,67.5 X6.16@129.16,68.756
  Bottom Layer w0.203: v3(99.465,127.845) 99.542,127.767 99.542,127.464 99.569,127.438 98.838,126.706 98.838,104.643 v3(99.498,103.983) ; v3(109.404,103.983) 109.404,100.802 108.794,100.193 108.794,91.998 109.048,91.744 109.048,69.835 109.513,69.371 v3(109.59,69.371)
D9: U4.44 U5.44 X6.9 | length 84.6
  Top Layer w0.203: U4.44@97.601,105.621 v3@99.274,105.621 ; U5.44@97.72,129.483 v3@99.393,129.483 ; v3(99.498,105.507) v3(109.658,105.507) ; v3(110.166,76.805) 110.217,76.856 115.719,76.856 116.576,77.713 121.278,77.713 121.322,77.669 121.87,77.669 121.92,77.719 125.277,77.719 X6.9@126.62,76.376
  Bottom Layer w0.203: v3(99.498,105.507) 99.498,106.097 99.346,106.249 99.346,126.64 100.277,127.571 100.277,128.119 99.617,128.779 v3(99.617,129.369) ; v3(109.658,105.507) 110.115,105.05 110.115,98.814 110.064,98.763 110.064,92.637 110.318,92.383 110.318,84.705 110.166,84.552 v3(110.166,76.805)